# Altium PCB PCB.PcbDoc
Units mil, origin at the board's own origin, x right, y up, seen from the top; angles counter-clockwise.
Board outline 2190 x 1525 mil, 2 copper layers (Top Layer, Bottom Layer); 21 components, 16 nets, 92 pads, 13 vias.
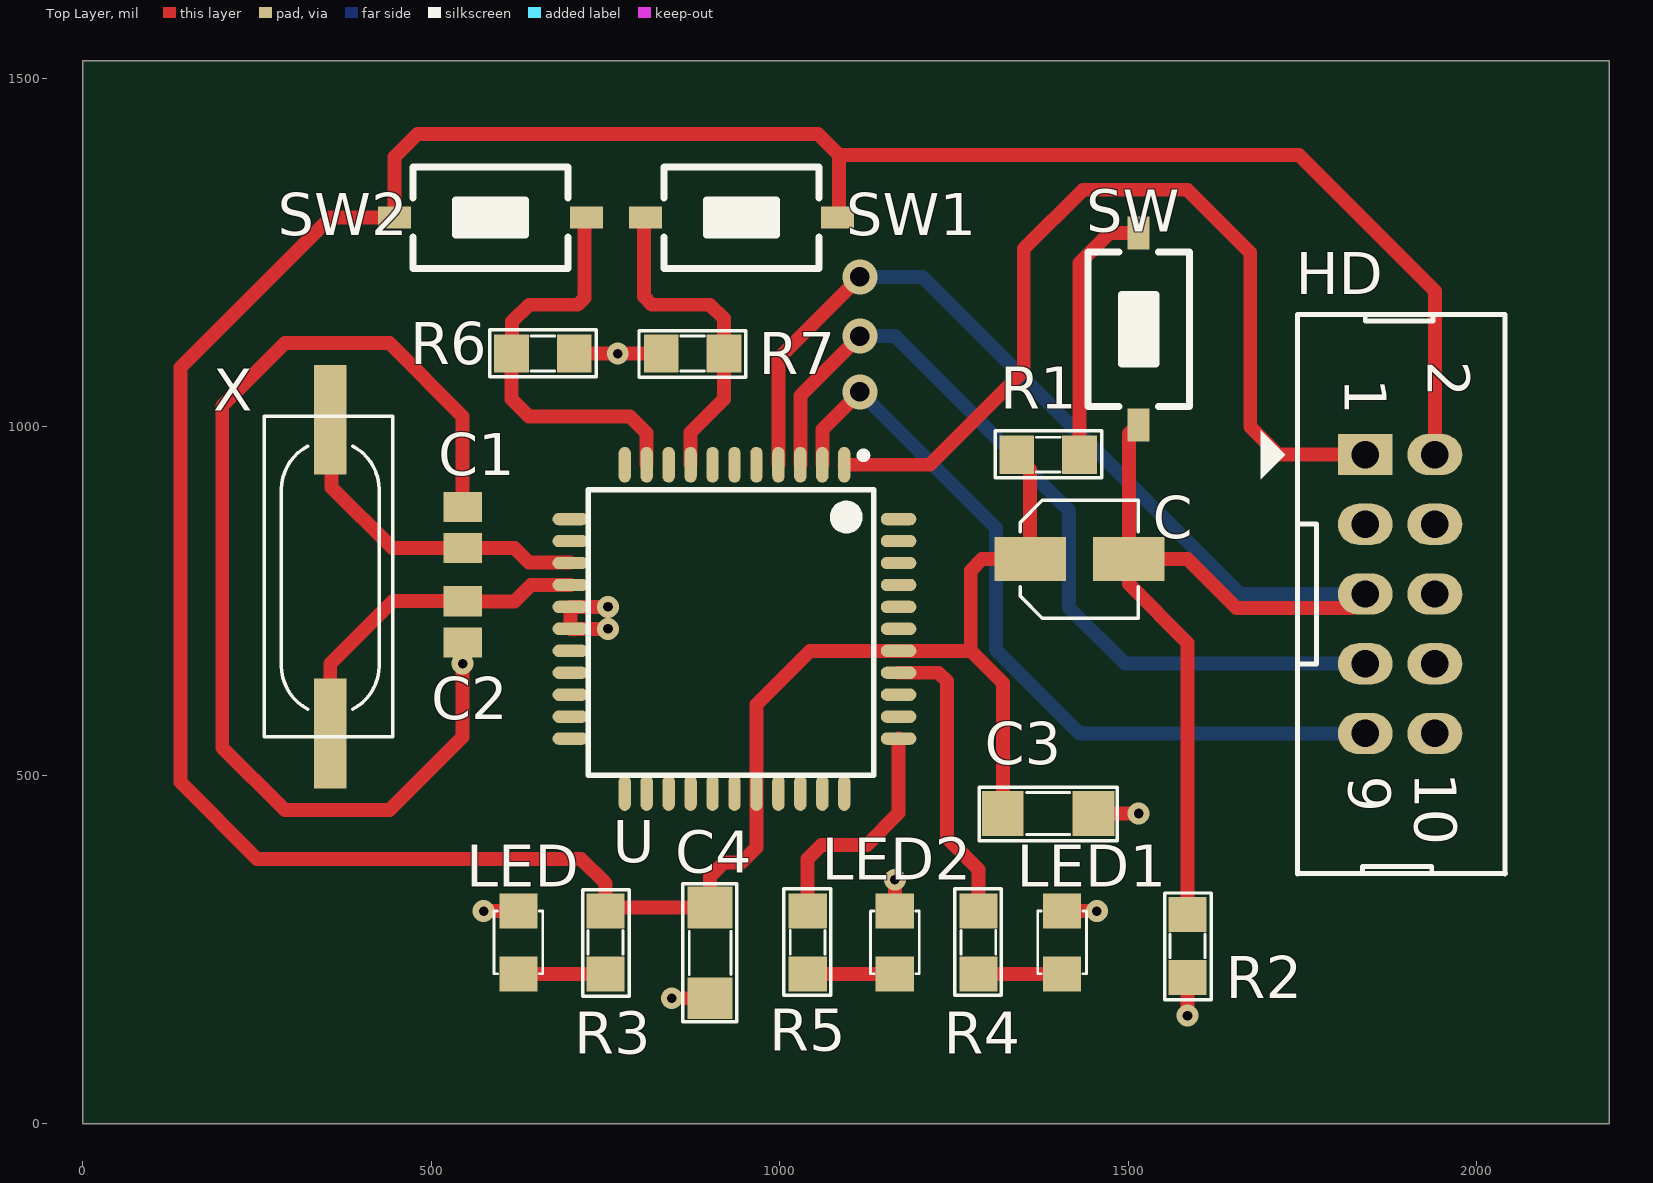
[diagram p0: Top Layer view]
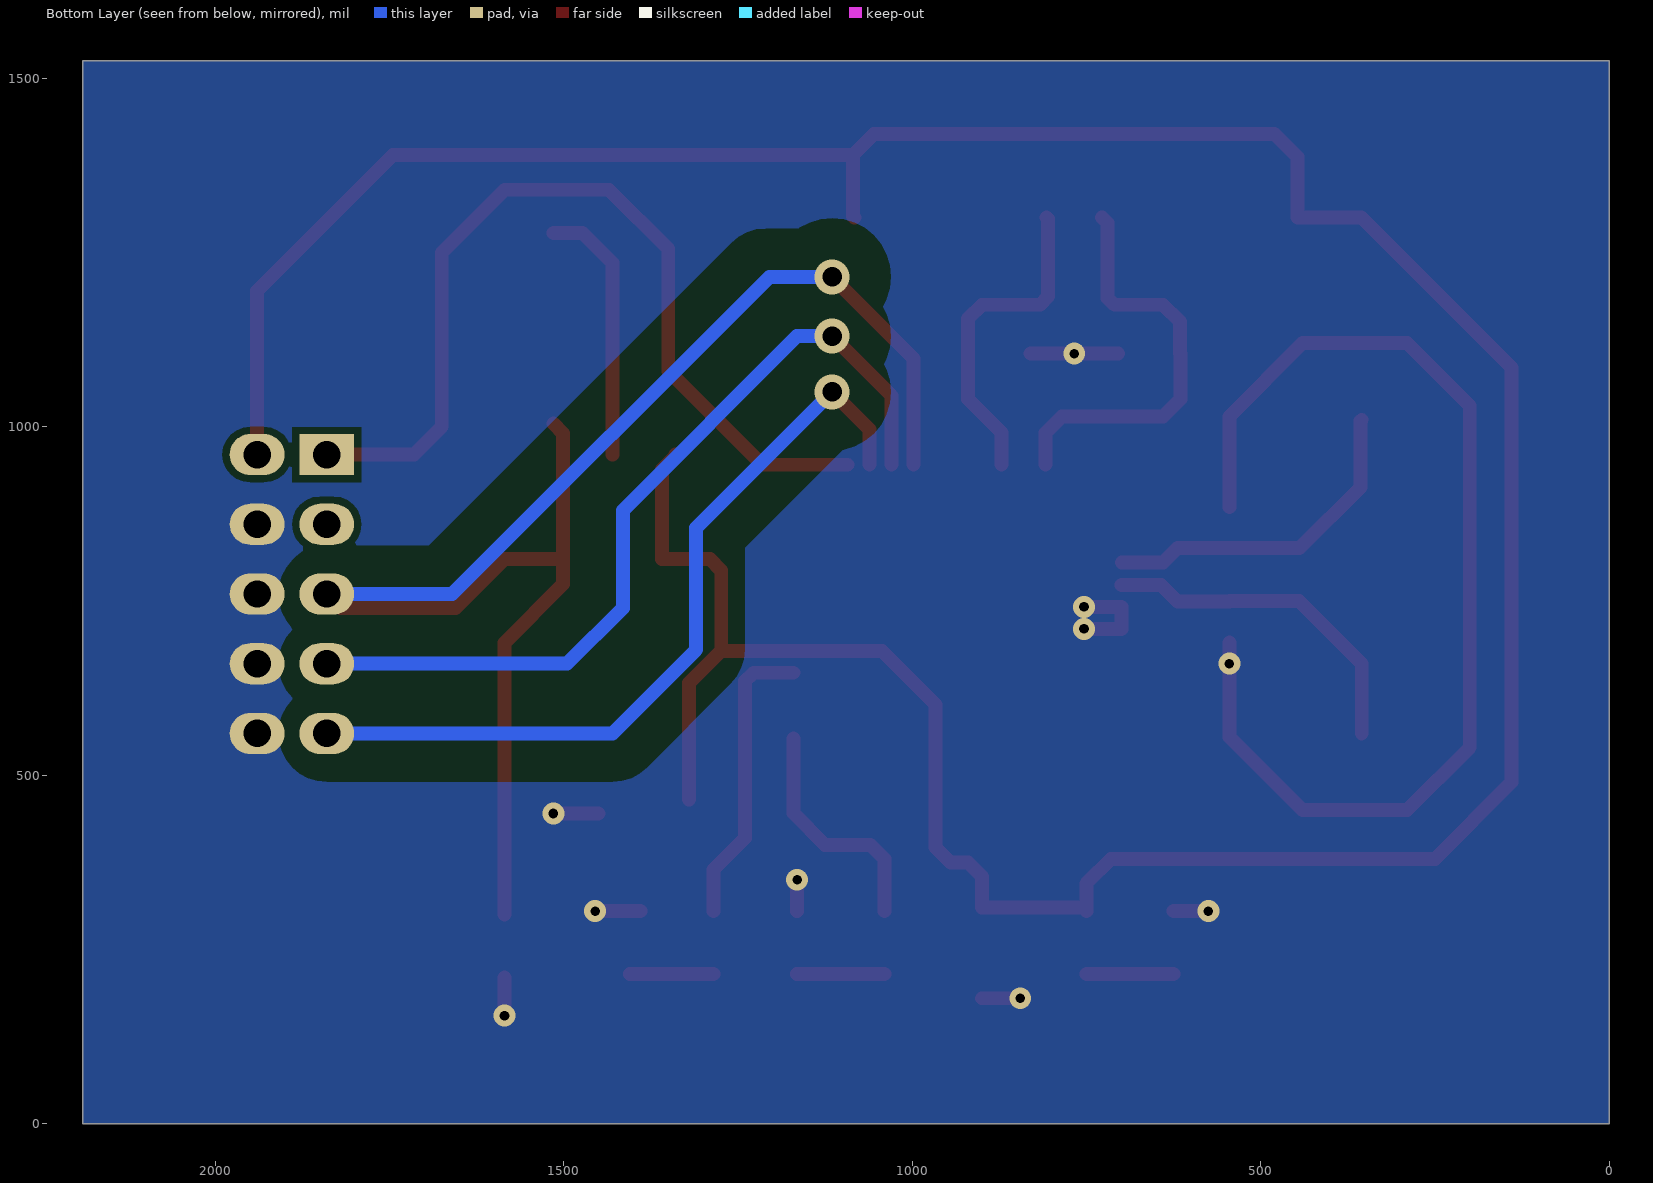
[diagram p1: Bottom Layer view, seen from below]
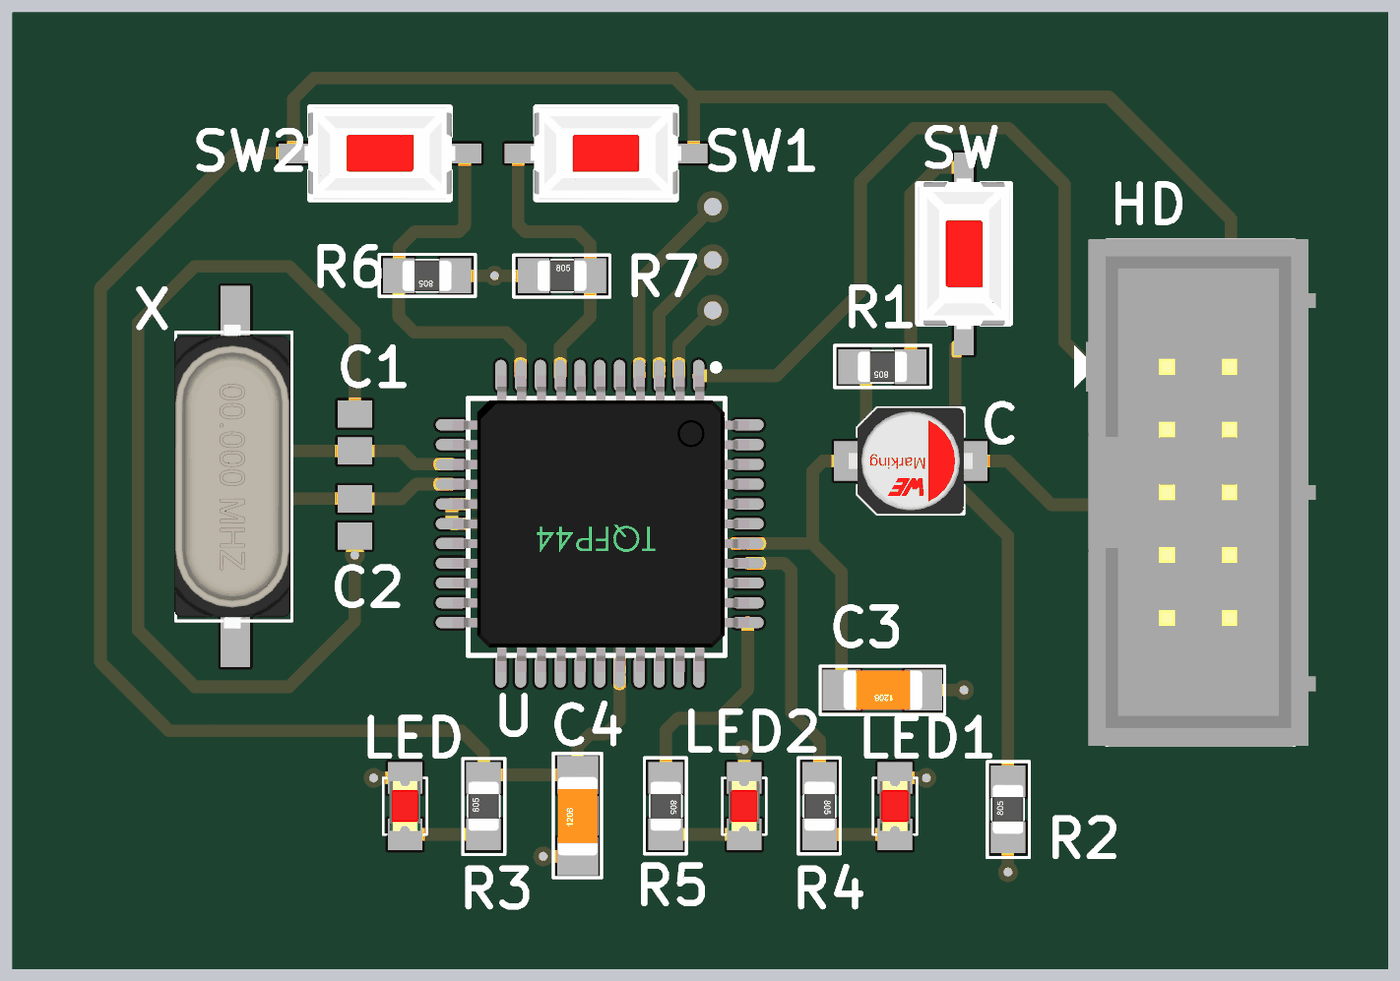
[diagram p2: 3D render of the assembled board from above, using the file's embedded part models]

## Layer stack, top to bottom
Top Solder: solder mask 0.4, Solder Resist, Dk 3.5
Top Layer: signal copper 1.4
Dielectric 1: dielectric 12.6, FR-4, Dk 4.8
Bottom Layer: signal copper 1.4
Bottom Solder: solder mask 0.4, Solder Resist, Dk 3.5

## Board outline
0,0 2190,0 2190,1525 0,1525

## Design rules (kind name [scope] priority, off if disabled: settings)
Clearance Clearance_1 [InNamedPolygon('Bottom Layer-No Net')] p1: gap=10 ignorepadtopadclearanceinfootprint=TRUE except(0: Arc-Hole Track-Hole SMDPad-Hole THPad-Hole Via-Hole Fill-Hole Poly-Hole Region-Hole Text-Hole; 59.06: Arc-Fill Arc-Poly Arc-Region Track-Fill Track-Poly Track-Region Via-Fill Via-Poly Via-Region Fill-Fill Fill-Poly Fill-Region Poly-Poly Poly-Region Region-Region)
Clearance [All] p2: gap=10 ignorepadtopadclearanceinfootprint=TRUE except(0: Arc-Hole Track-Hole SMDPad-Hole THPad-Hole Via-Hole Fill-Hole Poly-Hole Region-Hole Text-Hole)
PolygonConnect PolygonConnect_2 [All vs IsNamedPolygon('Bottom Layer-No Net')] p1: connectstyle=Direct reliefconductorwidth=10 reliefentries=4 polygonreliefangle="90 Angle" airgapwidth=10
PolygonConnect PolygonConnect_1 [All vs IsNamedPolygon('Bottom Layer-No Net')] p2: connectstyle=Relief reliefconductorwidth=78.74 reliefentries=4 polygonreliefangle="90 Angle" airgapwidth=39.37
PolygonConnect [All] p3: connectstyle=Relief reliefconductorwidth=10 reliefentries=4 polygonreliefangle="90 Angle" airgapwidth=10
RoutingVias [All] p1: holewidth=28 width=50 viastyle="Through Hole" minholewidth=28 minwidth=50 maxholewidth=28 maxwidth=50
SolderMaskExpansion [All] p1: expansion=4
Width [All] p1: maxlimit=50 minlimit=10 preferedwidth=20 minimp=50.000000 maximp=50.000000 favimp=50.000000
30 further rules are at their usual default settings.

## Components (designator, comment, footprint, x,y, rotation, side; value= is the part's Value field where it differs from the comment)
C "100uF" CAP-ALU-SMD-4.5x5x1.4 1430,810 r0 top
C1 "33pF" C0805 545,855.47 r270 top value=33p
C2 "33pF" C0805 545,720 r90 top value=33p
C3 "100nF" SM-Cap-1206 1450,445 r180 top value=0,1uF/300V
C4 "100nF" SM-Cap-1206 900,180 r90 top value=0,1uF/300V
HD "Header 5x2" Hed2X5 1840,960 r270 top
LED "LED" LED-0805-Red 625,215 r90 top value="LED 3 - 5 ly 2 Colour"
LED1 "LED1" LED-0805-Red 1405,215 r90 top value="LED 3 - 5 ly 2 Colour"
LED2 "LED" LED-0805-Red 1165,215 r90 top value="LED 3 - 5 ly 2 Colour"
R1 "100" SM-RES-0805 1430,960 r180 top value="R1/4W - 1K"
R2 "8.2k" SM-RES-0805 1585,210 r90 top value="R1/4W - 1K"
R3 "220" SM-RES-0805 750,215 r90 top value="R1/4W - 1K"
R4 "220" SM-RES-0805 1285,305 r270 top value="R1/4W - 1K"
R5 "220" SM-RES-0805 1040,305 r270 top value="R1/4W - 1K"
R6 "10k" SM-RES-0805 830,1105 r0 top value="R1/4W - 1K"
R7 "10k" SM-RES-0805 705,1105 r180 top value="R1/4W - 1K"
SW "" SW1-SMD 1515,1140 r270 top value="SW chip 2 pin"
SW1 "" SW1-SMD 945,1300 r180 top value="SW chip 2 pin"
SW2 "" SW1-SMD 585,1300 r0 top value="SW chip 2 pin"
U "AT89S52-24AU" TQFP44 935,710 r270 top
X "12Mhz" XTAL-RU49/4 355,590 r90 top value=4Mhz

## Footprints (in the part's own frame and the unit in brackets; to place one, negate y for a bottom-side part, rotate by r counter-clockwise, add the part's x,y. Pads: shape width x height; smd on the part's side, far side on the other; paste and mask are expansions set on the pad)
C0805 [mm] "Chip Capacitor, Body 2.0x1.3mm, IPC High Density"
  rect 1.1x1.4 smd: 1(-0.75,0) 2(0.75,0)
  body extent -1.1,-0.72 1.1,0.72, height 1.4
CAP-ALU-SMD-4.5x5x1.4 [mm]
  rect 2.6x1.6 smd: 1(-1.8,0) 2(1.8,0)
  silkscreen extent -2.15,-2.15 2.15,2.15, body extent -2.5,-2.15 2.5,2.15, height 5.45
Hed2X5 [mm] "Header 10x2,20 pin, connecter"
  rect 1.5x2 hole 1: 1(0,0)
  oval 1.5x2 hole 1: 2(0,2.54) 3(2.54,0) 4(2.54,2.54) 5(5.08,0) 6(5.08,2.54) 7(7.62,0) 8(7.62,2.54) 9(10.16,0) 10(10.16,2.54)
  silkscreen extent -5.1,-3.81 15.29,5.11, body extent -5.17,-3.33 15.33,5.97, height 8.82
LED-0805-Red [mil]
  rect 50x55 smd: 1(0,0) 2(90,0)
  silkscreen extent 0,-35 90,35, body extent 5,-25 85,25, height 43
SM-Cap-1206 [mil]
  rect 60x65 smd: 1(0,0) 2(130,0)
  silkscreen extent -34,-38 164,39, body extent 1,-31 127,32, height 40
SM-RES-0805 [mil]
  rect 50x55 smd: 1(0,0) 2(90,0)
  silkscreen extent -32,-34 121,33, body extent 6,-25 84,25, height 31
SW1-SMD [mm]
  rect 1.2x0.8 smd: 1(-3.5,0) 2(3.5,0)
  silkscreen extent -2.82,-1.85 2.82,1.85, body extent -3.05,-1.85 3.05,1.85, height 2.5
TQFP44 [mm] "TQFP, 44-Leads, Body 10X10mm, Pitch 0.80mm, IPC High Density"
  oval 1.3x0.45 smd: 1(-5.981,4) 2(-5.981,3.2) 3(-5.981,2.4) 4(-5.981,1.6) 5(-5.981,0.8) 6(-5.981,0) 7(-5.981,-0.8) 8(-5.981,-1.6) 9(-5.981,-2.4) 10(-5.981,-3.2) 11(-5.981,-4) 23(5.981,-4) 24(5.981,-3.2) 25(5.981,-2.4) 26(5.981,-1.6) 27(5.981,-0.8) 28(5.981,0) 29(5.981,0.8) 30(5.981,1.6) 31(5.981,2.4) 32(5.981,3.2) 33(5.981,4)
  oval 0.45x1.3 smd: 12(-4,-5.981) 13(-3.2,-5.981) 14(-2.4,-5.981) 15(-1.6,-5.981) 16(-0.8,-5.981) 17(0,-5.981) 18(0.8,-5.981) 19(1.6,-5.981) 20(2.4,-5.981) 21(3.2,-5.981) 22(4,-5.981) 34(4,5.981) 35(3.2,5.981) 36(2.4,5.981) 37(1.6,5.981) 38(0.8,5.981) 39(0,5.981) 40(-0.8,5.981) 41(-1.6,5.981) 42(-2.4,5.981) 43(-3.2,5.981) 44(-4,5.981)
  silkscreen extent -6.45,-5.33 5.33,5.07, body extent -5.99,-5.96 6.01,6.04, height 1.05
XTAL-RU49/4 [mm]
  rect 4x1.2 smd: 1(-0.762,0) 2(10.668,0)
  silkscreen extent -0.89,-2.29 10.8,2.41, body extent -1.2,-2.22 11.1,2.48, height 4.3

## Part data
C: library part CN-ALU-SMD, "Polarized Capacitor (Axial)", LatestRevisionDate=17-Jul-2002, LatestRevisionNote="Re-released for DXP Platform.", PackageReference=POLAR0.8, Published=8-Jun-2000, Publisher="Altium Limited"
C1 C2: library part CapSMD, "Capacitor", LatestRevisionDate=17-Jul-2002, LatestRevisionNote="Re-released for DXP Platform.", PackageReference=RAD-0.3, Published=8-Jun-2000, Publisher="Altium Limited"
C3 C4: library part CN, Designed by=VanDungEvn
HD: library part HED5x2
LED LED1 LED2: library part "LED SMD"
R1 R2 R3 R4 R5 R6 R7: library part R1/4W, "Resistor 1/4W"
SW SW1 SW2: library part SW2, "Switch button 2 pin"
U: "Atmel 8 Bit Micro 4.0-5.5V 24MHz -40 to +80 Deg C 44TQFP (44A) Package GREEN OPTION", Package="44A 44-lead, Thin Plastic Gull Wing Quad Flatpack (TQFP)", GREEN OPTION=YES, PartNr=AT89S52-24AU, Vendor=ATMEL
X: library part XT2, "Crystal, 32.768 KHz, -40 to 85 degC, 3.2 x 1.5 x 0.9 mm SMD"

## Via types
v1: diameter 31.5, hole 13.78, Top Layer to Bottom Layer, tented both sides, 10 vias
v2: diameter 50, hole 28, Top Layer to Bottom Layer, tented both sides, 3 vias

## Nets (pads, with @x,y where several pads share a name; then routed paths per layer and width w, separated by ;. In a path a pad name is that pad's centre, name@x,y a point inside that pad or via, vN(x,y) a via of type N, cw(c..) or ccw(c..) an arc to the next point about the centre after c; other vN are vias at no path point)
GND: C1.1 C2.1 C3.1 C4.1 HD.4 HD.6 HD.8 HD.10 LED1.2 LED2.2 LED.2 R2.1 R6.1 R7.1 U.16 U.17 | length 2206.5
  Top Layer w20: C2.1 v1(545,660) 545,555 440,450 290,450 200,540 200,1030 290,1120 440,1120 545,1015 C1.1 ; v1(575,305) LED.2 ; R7.1 v1(767.5,1105) R6.1 ; v1(753.5,710) U.17 U.16 v1(753.5,741.5) ; v1(845,180) C4.1 ; LED2.2 v1(1165,350) ; LED1.2@1390,305 LED1.2 v1(1455,305) ; C3.1 v1(1515,445) ; v1(1585,155) R2.1
INT0: R6.2 SW1.2 U.8 | length 471.7
  Top Layer w20: SW1.2 805,1297.8 805,1186.72 816.72,1175 900,1175 920,1155 R6.2 920,1040 872.01,992.01 U.8
MISO: HD.9 U.2 | length 1157.4
  Top Layer w20: U.2 1060.98,995.98 v2(1115,1050)
  Bottom Layer w20: v2(1115,1050) 1310,855 1310,680 1430,560 HD.9
MOSI: HD.1 U.1 | length 1317.3
  Top Layer w20: U.1 1215.47,945.47 1350,1080 1350,1255 1435,1340 1585,1340 1675,1250 1675,1000 1715,960 HD.1
NetC1_2: C1.2 U.14 X.2 | length 484.6
  Top Layer w20: X.2 357.02,1007.98 357.02,912.98 444.06,825.94 C1.2 619.06,825.94 640,805 U.14@699.02,805
NetC2_2: C2.2 U.15 X.1 | length 491.7
  Top Layer w20: X.1 355,660 445,750 544.53,750 C2.2 619.53,749.53 642.99,772.99 U.15
NetLED1_1: LED1.1 R4.2 | length 120
  Top Layer w20: R4.2 LED1.1
NetLED2_1: LED2.1 R5.2 | length 125
  Top Layer w20: R5.2 LED2.1
NetLED_1: LED.1 R3.1 | length 125
  Top Layer w20: LED.1 R3.1
NetR1_1: R1.1 SW.1 | length 377.7
  Top Layer w20: R1.1 1430,1235 1472.8,1277.8 SW.1
NetR4_1: R4.1 U.37 | length 423.1
  Top Layer w20: U.37 1227.99,647.01 1240,635 1240,410 1285,365 R4.1
NetR5_1: R5.1 U.34 | length 339.6
  Top Layer w20: R5.1 1040,380 1060,400 1125,400 1170.47,445.47 U.34
RESET: C.2 HD.5 R2.2 SW.2 U.4 | length 2360
  Top Layer w20: U.4 997.99,1097.99 v2(1115,1215) ; SW.2@1515,1004.33 1500.87,990.2 C.2 ; R2.2 1585,690 1500.87,774.13 C.2 ; HD.5 1820,740 1655,740 1585,810 C.2
  Bottom Layer w20: v2(1115,1215) 1205,1215 1660,760 HD.5 HD.5@1835,765
SCK: HD.7 U.3 | length 1221.6
  Top Layer w20: U.3 1029.49,1044.49 v2(1115,1130)
  Bottom Layer w20: v2(1115,1130) 1165,1130 1415,880 1415,740 1495,660 HD.7
TIM0: R7.2 SW2.2 U.10 | length 607.6
  Top Layer w20: SW2.2@727.8,1300 720,1292.2 720,1185 710,1175 640,1175 615.78,1150.78 615.78,1105.78 R7.2 615,1040 640,1015 785,1015 809.02,990.98 U.10
VCC: C3.2 C4.2 C.1 HD.2 R1.2 R3.2 SW1.1 SW2.1 U.29 U.38 | length 5136.9
  Top Layer w20: SW1.1 1085,1302.2 1085,1390 ; C3.2@1320,465 1320,632.5 1274,678.5 ; R1.2 1340,957.5 1359.13,938.37 C.1 1290,810 1274,794 1274,678.5 ; HD.2 1940,1195 1745,1390 1085,1390 ; 1085,1390 1055,1420 480,1420 447.2,1387.2 SW2.1 355,1300 140,1085 140,490 250,380 715,380 750,345 R3.2 755,310 C4.2 900,355 920,375 945,375 966.5,396.5 U.29 966.5,601.5 1043.5,678.5 U.38 1274,678.5
pads on no net: HD.3 U.5 U.6 U.7 U.9 U.11 U.12 U.13 U.18 U.19 U.20 U.21 U.22 U.23 U.24 U.25 U.26 U.27 U.28 U.30 U.31 U.32 U.33 U.35 U.36 U.39 U.40 U.41 U.42 U.43 U.44

## Polygon pours and split planes (outlines as drawn)
GND on Bottom Layer "Bottom Layer-No Net" (solid, remove dead copper, pour order 0): 0,0 2190,0 2190,1525 0,1525

## Text inside footprints (layer, text, board x,y; h text height)
HD: Top Overlay "10" at 1911,504 h60 r270; Top Overlay "9" at 1816,499 h60 r270; Top Overlay "2" at 1930,1095 h60 r270; Top Overlay "1" at 1810.47,1069.25 h60 r270